# Altium PCB Sensor.PcbDoc
Units mil, origin at the board's own origin, x right, y up, seen from the top; angles counter-clockwise.
Board outline 3791.34 x 3901.57 mil, 2 copper layers (Top Layer, Bottom Layer); 36 components, 32 nets, 146 pads, 0 vias.
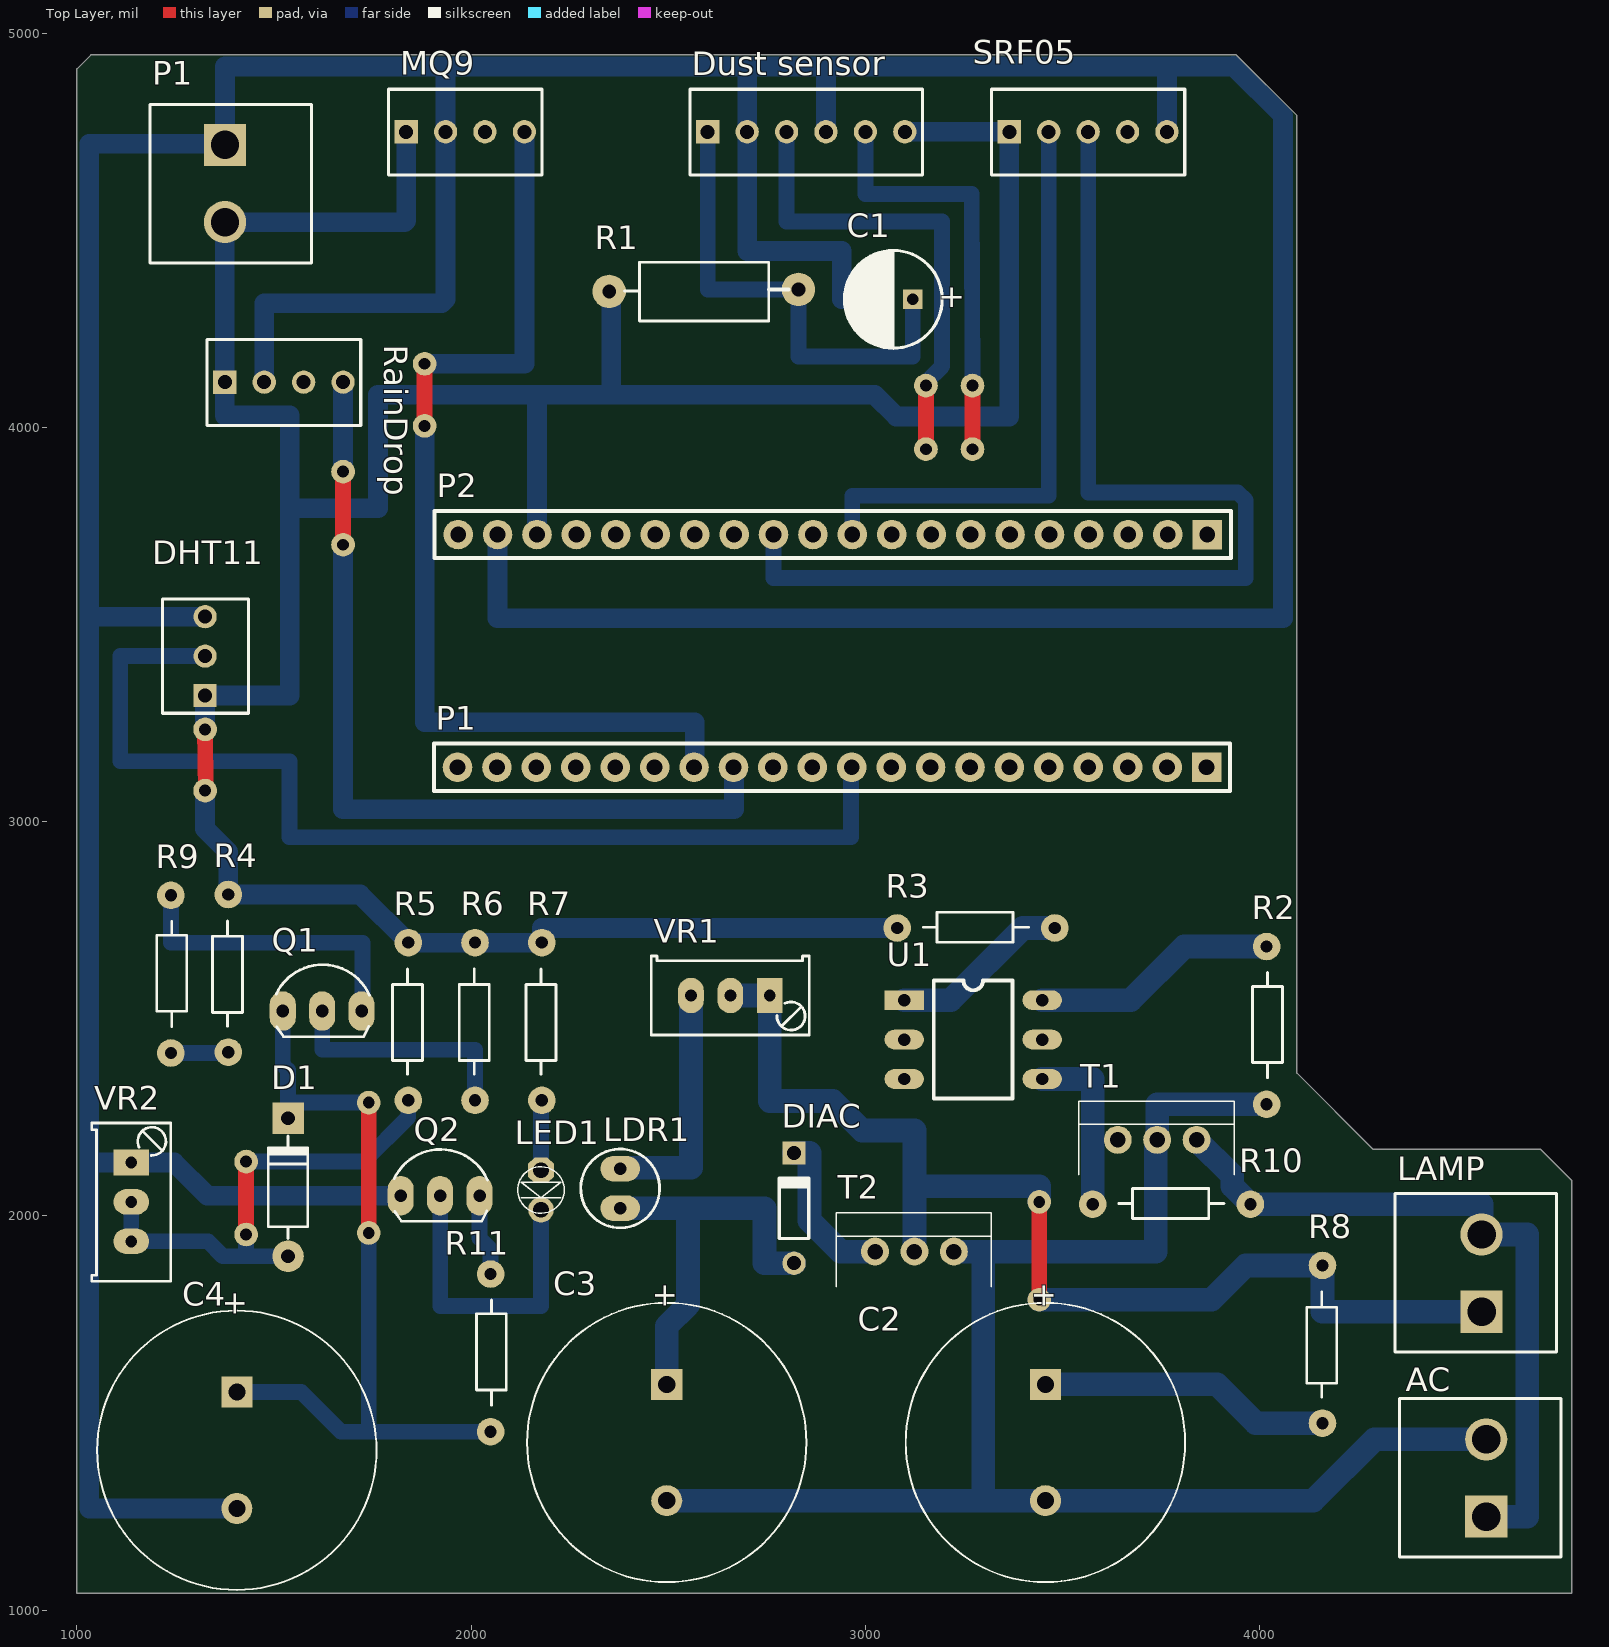
[diagram p0: Top Layer view]
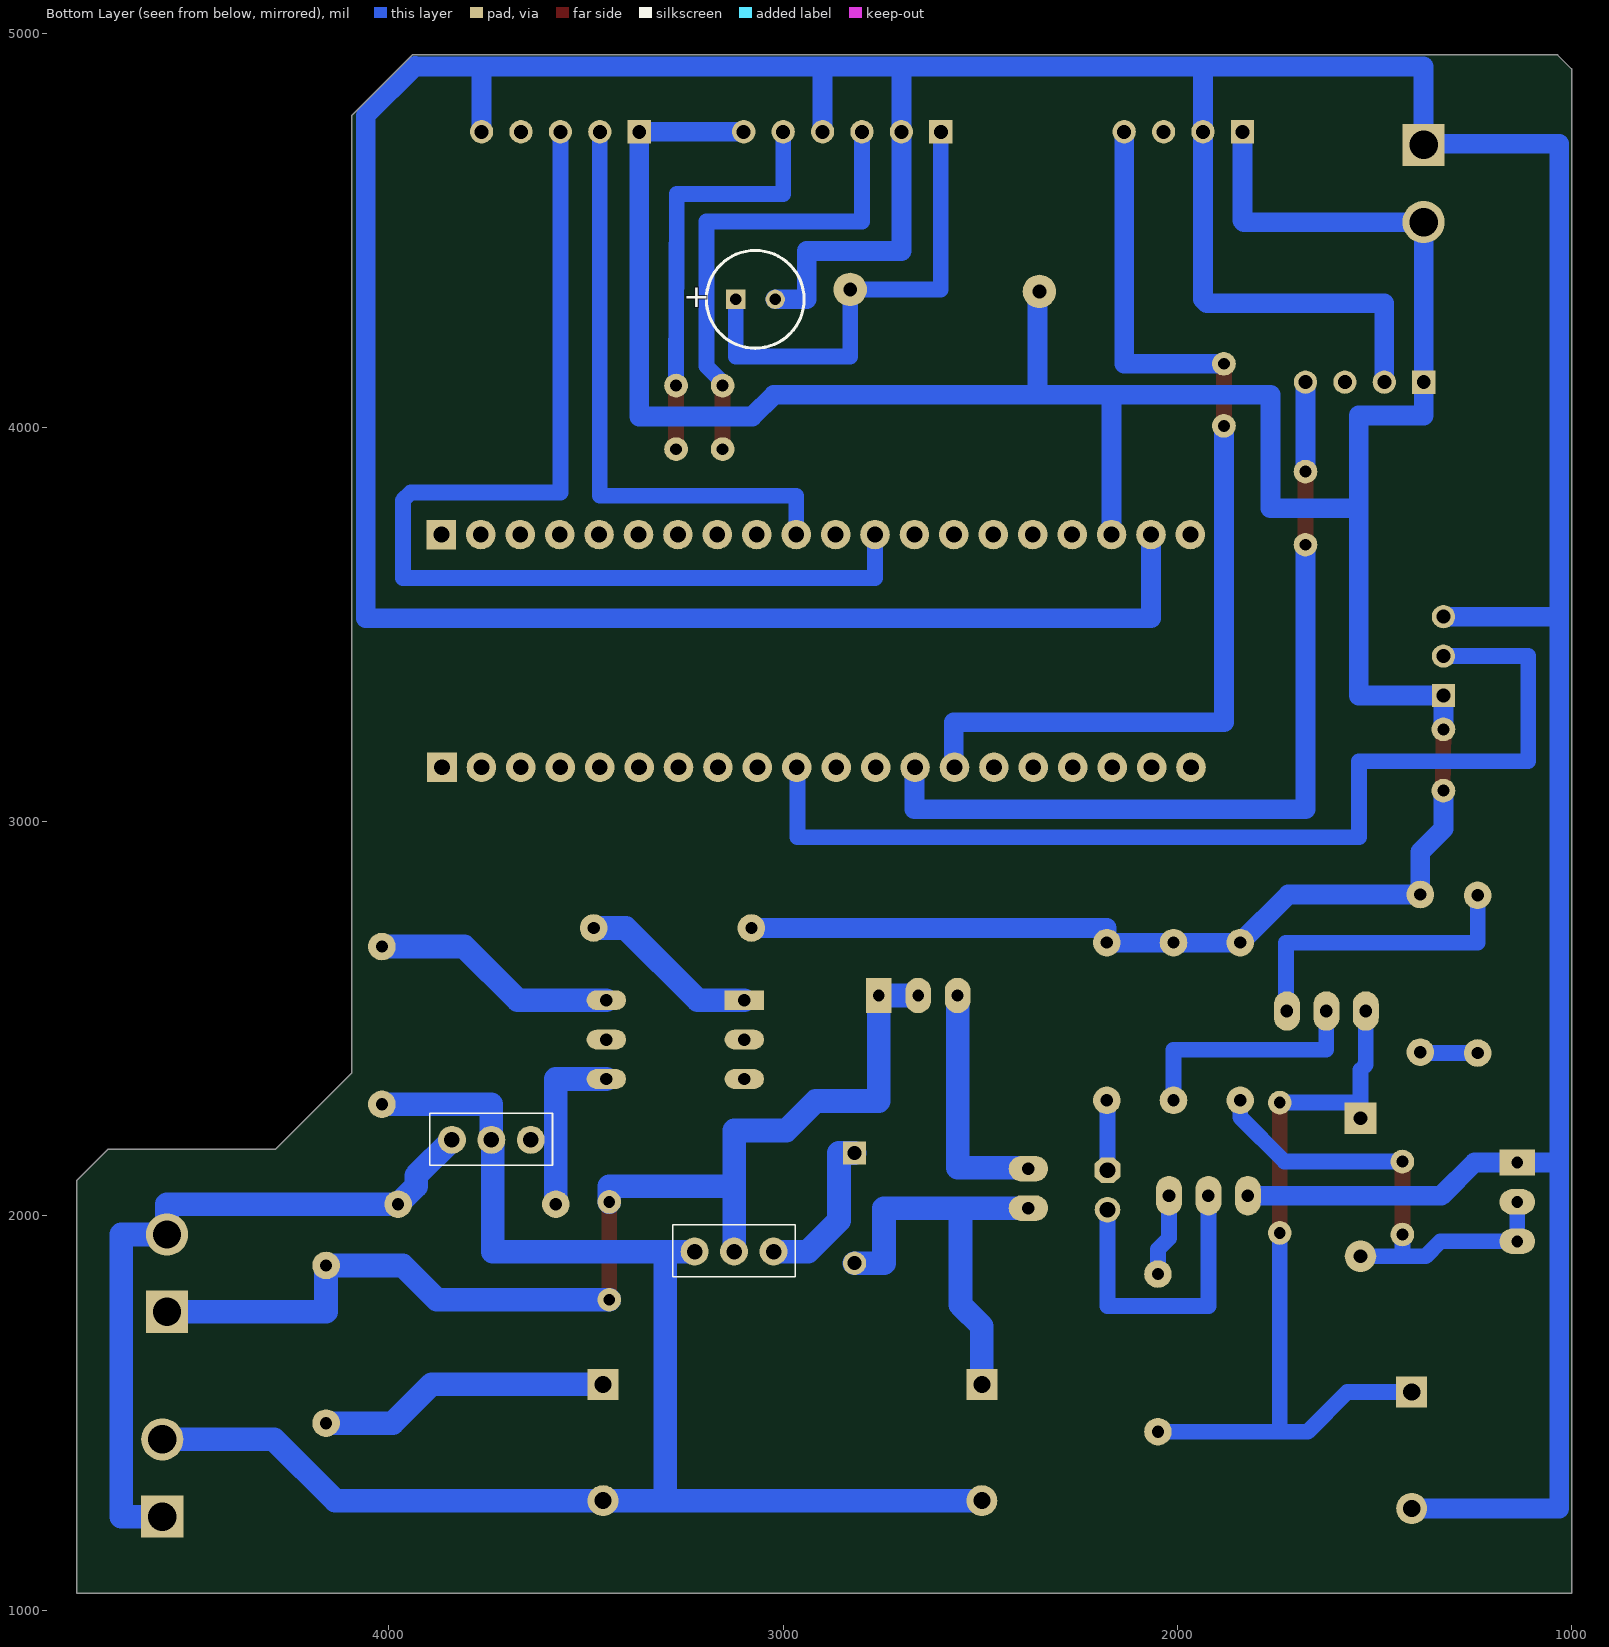
[diagram p1: Bottom Layer view, seen from below]
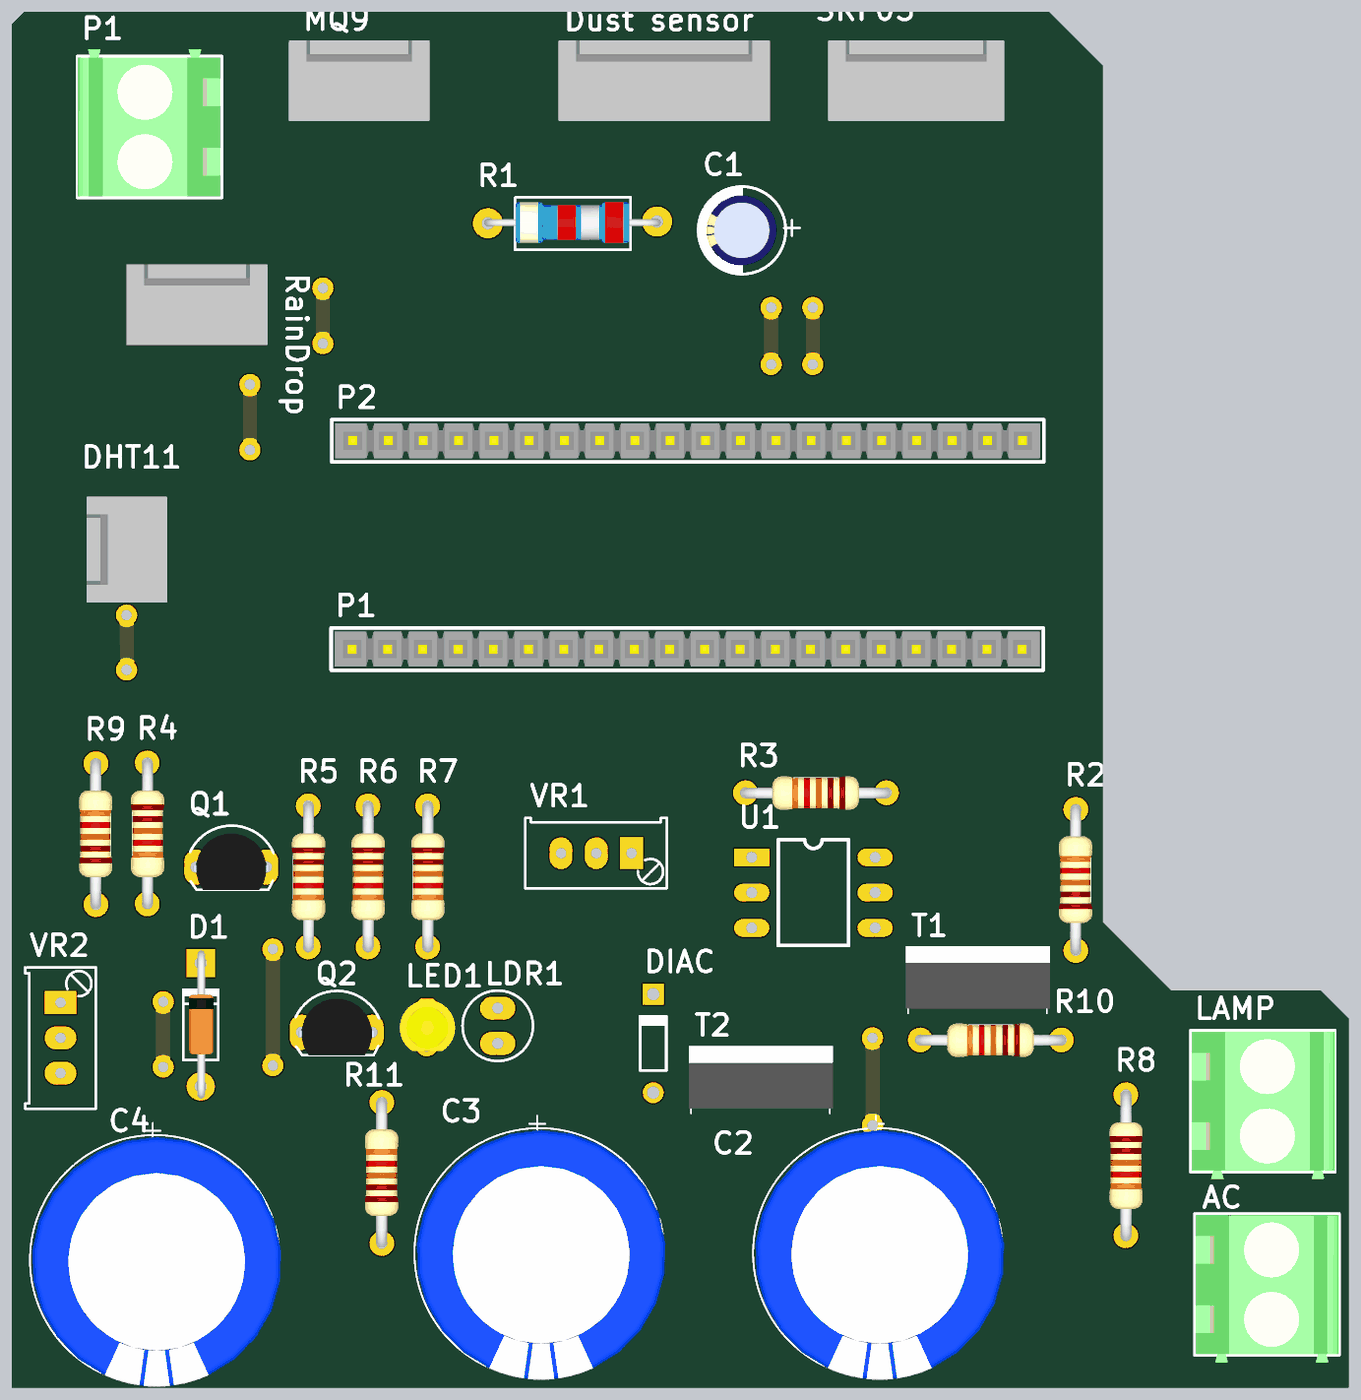
[diagram p2: 3D render of the assembled board from above, using the file's embedded part models]

## Layer stack, top to bottom
Top Solder: solder mask 0.4, Solder Resist, Dk 3.5
Top Layer: signal copper 1.4
Dielectric 1: dielectric 12.6, FR-4, Dk 4.8
Bottom Layer: signal copper 1.4
Bottom Solder: solder mask 0.4, Solder Resist, Dk 3.5

## Board outline
1000,1043.31 1000,4909.45 1035.43,4944.88 3940.94,4944.88 4094.49,4791.34 4094.49,2362.2 4287.4,2169.29 4712.6,2169.29 4791.34,2090.55 4791.34,1043.31

## Design rules (kind name [scope] priority, off if disabled: settings)
Clearance [All] p1: gap=20 ignorepadtopadclearanceinfootprint=FALSE
PolygonConnect [All] p1: connectstyle=Relief reliefconductorwidth=10 reliefentries=4 polygonreliefangle="90 Angle" airgapwidth=10
RoutingVias [All] p1: holewidth=30 width=60 viastyle="Through Hole" minholewidth=30 minwidth=60 maxholewidth=30 maxwidth=60
SolderMaskExpansion [All] p1: expansion=4
UnRoutedNet [All] p1: checkbadconnections=TRUE
Width [All] p1: maxlimit=60 minlimit=20 preferedwidth=60 toplayer_maxwidth=50 toplayer_prefwidth=40 minimp=50.000000 maximp=50.000000 favimp=50.000000
29 further rules are at their usual default settings.

## Components (designator, comment, footprint, x,y, rotation, side; value= is the part's Value field where it differs from the comment)
AC "Header 2" "TBlock 2" 4574.8,1237.07 r90 top
C1 "Cap Pol" "RADIAL C" 3120,4325 r180 top value=100uF
C2 "100uF" Cap-P-7.5/18BL 3456.69,1425.2 r270 top
C3 "100uF" Cap-P-7.5/18BL 2496.06,1425.2 r270 top
C4 "100uF" Cap-P-7.5/18BL 1405.51,1405.51 r270 top
D1 "1N4007" D1A 1535.43,1897.64 r270 top
DHT11 "Header3" HDR3 1325,3320 r90 top
DIAC "Diode" DO-35 2818.9,2019.68 r90 top value=FRxxx
"Dust sensor" "Header6" HDR6 2600,4750 r0 top
LAMP "Header 2" "TBlock 2" 4562.99,1756.76 r90 top
LDR1 "LDR" CDS 2377.95,2019.68 r90 top
LED1 "LED" LED-3MM-YELLOW 2177.17,2115.75 r270 top value="LED 3 ly Single Colour"
MQ9 "Header4" HDR4 1835,4750 r0 top
P1 "Header 20" "Header 20" 3865.35,3137.8 r180 top
P1 "Header 2" "TBlock 2" 1375.44,4716.84 r270 top
P2 "Header 20" "Header 20" 3866.93,3728.35 r180 top
Q1 "C1815" TO92-123 1622.05,2519.68 r0 top
Q2 "C1815" TO92-123 1921.26,2051.18 r0 top
R1 "Res" RES-1/2W 2610,4345 r180 top
R2 "1k" Res1/4W 4015.75,2488.19 r270 top value="R1/4W - 1K"
R3 "1k" Res1/4W 3275.59,2728.35 r0 top value="R1/4W - 1K"
R4 "1k" Res1/4W 1385.83,2610.24 r90 top value="R1/4W - 1K"
R5 "1k" Res1/4W 1842.49,2488.19 r90 top value="R1/4W - 1K"
R6 "1k" Res1/4W 2011.78,2488.19 r90 top value="R1/4W - 1K"
R7 "1k" Res1/4W 2181.08,2488.19 r90 top value="R1/4W - 1K"
R8 "1k" Res1/4W 4161.42,1669.29 r90 top value="R1/4W - 1K"
R9 "1k" Res1/4W 1236.22,2618.11 r270 top value="R1/4W - 1K"
R10 "1k" Res1/4W 3771.65,2027.56 r0 top value="R1/4W - 1K"
R11 "1k" Res1/4W 2047.24,1657.48 r270 top value="R1/4W - 1K"
RainDrop "Header4" HDR4 1375,4115 r0 top
SRF05 "Header5" HDR5 3365,4750 r0 top
T1 "BTA16" TO-220N 3640.16,2192.91 r270 top
T2 "BTA16" TO-220N 3024.41,1909.45 r270 top
U1 "MOC3021" DIP6 3098.43,2547.24 r0 top
VR1 "50K" VR-S3 2757.48,2559.06 r180 top value="Volume 50k"
VR2 "50K" VR-S3 1137.8,2135.43 r270 top value="Volume 50k"

## Footprints (in the part's own frame and the unit in brackets; to place one, negate y for a bottom-side part, rotate by r counter-clockwise, add the part's x,y. Pads: shape width x height; smd on the part's side, far side on the other; paste and mask are expansions set on the pad)
Cap-P-7.5/18BL [mm] "Polarized capacitors, Aluminum Electrolytic Capacitors, 2-Leads, Body 18x35.5x7.5x0.8"
  rect 2x2 hole 1.1: 1(-3.75,0)
  round 2 / inner rect 2x2 / far side round 2 hole 1.1: 2(3.75,0)
  silkscreen extent -9,-9 9,9, body extent -8.87,-8.87 9.13,9.13, height 16
CDS [mil] "QUANG TRO"
  oval 65x100 hole 32: 1(0,0) 2(100,0)
  silkscreen extent -50,-100 150,100
D1A [mil] "Diode 1A, W 100mil, L 350mil"
  round 80 hole 35: 1(0,0)
  rect 80x80 hole 35: 2(-350,0)
  silkscreen extent -305,-50 -45,50, body extent -386,-33 34,36, height 84
DIP6 [mm]
  rect 2.54x1.27 hole 0.8: 1(0,0)
  oval 2.54x1.27 hole 0.8: 2(0,-2.54) 3(0,-5.08) 4(8.89,-5.08) 5(8.89,-2.54) 6(8.89,0)
  silkscreen extent 1.91,-6.35 6.99,1.27, body extent 0.03,-6.35 8.86,1.29, height 5.4
DO-35 [mm] "Diode, Axial; Body 3.8 x 1.9 mm (LxDia. max), Lead Dia. 0.53 mm (max)"
  round 1.5 hole 0.9: 1(-3.55,0)
  rect 1.5x1.5 hole 0.9: 2(3.55,0)
  silkscreen extent -1.95,-0.95 2.05,0.95
HDR3 [mm] "Connector; Header; 3 Position"
  rect 1.5x1.5 hole 0.9: 1(0,0)
  round 1.5 hole 0.9: 2(2.54,0) 3(5.08,0)
  silkscreen extent -1.14,-2.79 6.22,2.74, body extent -1.27,-2.92 6.35,2.88, height 11.72
HDR4 [mm] "Connector; Header; 4 Position"
  rect 1.5x1.5 hole 0.9: 1(0,0)
  round 1.5 hole 0.9: 2(2.54,0) 3(5.08,0) 4(7.62,0)
  silkscreen extent -1.14,-2.79 8.76,2.74, body extent -1.27,-2.92 8.89,2.88, height 11.72
HDR5 [mm] "Connector; Header; 5 Position"
  rect 1.5x1.5 hole 0.9: 1(0,0)
  round 1.5 hole 0.9: 2(2.54,0) 3(5.08,0) 4(7.62,0) 5(10.16,0)
  silkscreen extent -1.14,-2.79 11.3,2.74, body extent -1.27,-2.92 11.43,2.88, height 11.72
HDR6 [mm] "Connector; Header; 6 Position"
  rect 1.5x1.5 hole 0.9: 1(0,0)
  round 1.5 hole 0.9: 2(2.54,0) 3(5.08,0) 4(7.62,0) 5(10.16,0) 6(12.7,0)
  silkscreen extent -1.14,-2.79 13.84,2.74, body extent -1.27,-2.92 13.97,2.88, height 11.72
"Header 20" [mil] "Connector; Header; 20 Position; Solder Pad 35mil"
  rect 75x75 hole 40: 1(0,0)
  round 75 hole 40: 2(100,0) 3(200,0) 4(300,0) 5(400,0) 6(500,0) 7(600,0) 8(700,0) 9(800,0) 10(900,0) 11(1000,0) 12(1100,0) 13(1200,0) 14(1300,0) 15(1400,0) 16(1500,0) 17(1600,0) 18(1700,0) 19(1800,0) 20(1900,0)
  silkscreen extent -60,-60 1960,60, body extent -50,-50 1950,50, height 330
LED-3MM-YELLOW [mil]
  oct 65x65 hole 40: 1(0,0)
  round 65 hole 40: 2(100,0)
  silkscreen extent -9,-59 109,59, body extent -27,-77 117,80, height 181
"RADIAL C" [mm] "Capacitor, Electrolytic, Radial; Body 6.3 x 6.8 mm (Dia.xH typ); Pin Spacing 2.5 mm (typ)"
  rect 1.25x1.25 hole 0.75: 1(0,0)
  round 1.25 hole 0.75: 2(2.54,0)
  silkscreen extent -1.9,-3.15 4.4,3.15, body extent -1.27,-2.54 3.81,2.54, height 13.7
Res1/4W [mil] "R 1/4W, 2 Pin, 350mil"
  round 70 hole 31: 1(-195,2) 2(205,2)
  silkscreen extent -129,-34 138,42, body extent -209,-46 217,48, height 111
RES-1/2W [mil]
  round 85 hole 35: 1(-220,-5) 2(260,0)
  silkscreen extent -195,-74 221,75, body extent -230,-60 270,56, height 121
"TBlock 2" [mil] "Connector; Terminal; 2 Positions; Solder Pad 35mil"
  rect 107x107 hole 72: 1(0,0)
  round 107 hole 72: 2(196,0)
  silkscreen extent -102,-190 300,220, body extent -122,-189 296,217, height 560
TO92-123 [mil] "TO-92"
  oval 66x100 hole 32: 1(-100,0) 2(0,0) 3(100,0)
  silkscreen extent -117,-65 120,118, body extent -109,-66 109,95, height 245
TO-220N [mm]
  round 1.8 hole 1: 1(0,0) 2(0,2.54) 3(0,5.08)
  silkscreen extent -2.5,-2.5 2.25,7.5, body extent -2.62,-2.67 1.88,7.73, height 18
VR-S3 [mil] "Variable Resistor"
  rect 65x90 hole 30: 1(0,0)
  oval 65x90 hole 30: 2(100,0) 3(200,0)
  silkscreen extent -100,-100 301,100, body extent -91,-98 291,90, height 430

## Part data
AC LAMP P1: "Header, 2-Pin", LatestRevisionDate=17-Jul-2002, LatestRevisionNote="Re-released for DXP Platform.", Publisher="Altium Limited"
C1: "Polarized Capacitor", LatestRevisionDate=17-Jul-2002, LatestRevisionNote="Re-released for DXP Platform.", PackageReference=POLAR0.8, Published=8-Jun-2000, Publisher="Altium Limited"
C2 C3 C4: library part "Cap Pol", "Cap Pol"
D1: library part "Diode 1A", "Diode 1A"
DHT11: "Header IDC, 3 x 1 Pin Vertical 2.54mm Pitch (Non-Boxed, Male)", Manufacturer="Würth Elektronik eiSos GmbH", partNo=613002143121, ComponentLink1 Description=Manufacturer, ComponentLink1URL=http://www.we-online.com, ComponentLink2 Description=Datasheet, ComponentLink2URL=http://katalog.we-online.de/em/datasheet/6130xx143121.pdf, Created by="Karrer Zheng", Created Date="29 March 2013", NoPins=02
"Dust sensor": "Header IDC, 6 x 1 Pin Vertical 2.54mm Pitch (Non-Boxed, Male)", Manufacturer="Würth Elektronik eiSos GmbH", partNo=613002143121, ComponentLink1 Description=Manufacturer, ComponentLink1URL=http://www.we-online.com, ComponentLink2 Description=Datasheet, ComponentLink2URL=http://katalog.we-online.de/em/datasheet/6130xx143121.pdf, Created by="Karrer Zheng", Created Date="29 March 2013", NoPins=02
LDR1: "Quang Tro"
LED1: "LED Single colour Green and Red"
MQ9 RainDrop: "Header IDC, 4 x 1 Pin Vertical 2.54mm Pitch (Non-Boxed, Male)", Manufacturer="Würth Elektronik eiSos GmbH", partNo=613002143121, ComponentLink1 Description=Manufacturer, ComponentLink1URL=http://www.we-online.com, ComponentLink2 Description=Datasheet, ComponentLink2URL=http://katalog.we-online.de/em/datasheet/6130xx143121.pdf, Created by="Karrer Zheng", Created Date="29 March 2013", NoPins=02
P1 P2: "Header, 20-Pin", LatestRevisionDate=17-Jul-2002, LatestRevisionNote="Re-released for DXP Platform.", Publisher="Altium Limited"
Q1 Q2: "NPN 600mW, ECB", =C2383
R1: Manufacturer="Generic Components", Class=Passive, Published=08/06/2000, Publisher="Altium Hobart Technology Centre", SubClass=R
R2 R3 R4 R5 R6 R7 R8 R9 R10 R11: library part Res1/4W, "Resistor"
SRF05: "Header IDC, 5 x 1 Pin Vertical 2.54mm Pitch (Non-Boxed, Male)", Manufacturer="Würth Elektronik eiSos GmbH", partNo=613002143121, ComponentLink1 Description=Manufacturer, ComponentLink1URL=http://www.we-online.com, ComponentLink2 Description=Datasheet, ComponentLink2URL=http://katalog.we-online.de/em/datasheet/6130xx143121.pdf, Created by="Karrer Zheng", Created Date="29 March 2013", NoPins=02
T1 T2: "Triac", ComponentLink2Description="Open Datasheet", ComponentLink2URL=H:\LIBRARY\LIBRARY.Datasheet\
U1: "Single Opto"
VR1 VR2: library part VR-S, "Var Resistor"
DIAC: Code_JEDEC=DO-204-AH, ComponentLink1Description="Digikey Part Link", ComponentLink1URL=http://www.fairchildsemi.com/, ComponentLink2Description="Open Datasheet", ComponentLink2URL=H:\LIBRARY\LIBRARY.Datasheet\ds26003.pdf, DatasheetDocument=1997, LatestRevisionDate=17-Jul-2002, LatestRevisionNote="Re-released for DXP Platform.", PackageReference=DO-35, Published=8-Jun-2000, Publisher="Altium Limited", Vendor=Digikey

## Free pads (board coordinates)
  round 60 hole 30: 6(3153.54,4106.3) 8(3271.65,4106.3) 9(3153.54,3944.88) 10(3271.65,3944.88) 16(1675,3887.99) 17(1675,3702.56) 18(1881.89,4161.42) 19(1881.89,4003.94) 20(1325,3234.06) 21(1325,3078.74) 23(1740.16,1956.69) 25(1740.16,2287.4) 26(1429.13,1952.76) 27(1429.13,2137.8) 28(3440.94,2035.43) 29(3440.94,1787.4)

## Nets (pads, with @x,y where several pads share a name; then routed paths per layer and width w, separated by ;. In a path a pad name is that pad's centre, name@x,y a point inside that pad or via, vN(x,y) a via of type N, cw(c..) or ccw(c..) an arc to the next point about the centre after c; other vN are vias at no path point)
Aout_MQ9: MQ9.4 P1.14 pad.18 pad.19 | length 2551.9
  Top Layer w40: pad.19 pad.18
  Bottom Layer w50: pad.19 1881.89,3251.97 2566.93,3251.97 2566.93,3137.8 P1.14 ; pad.18 2135,4161.42 MQ9.4
Aout_RainDrop: P1.13 pad.16 pad.17 RainDrop.4 | length 2183.3
  Top Layer w40: pad.17 pad.16
  Bottom Layer w50: pad.17 1675,3031.5 2666.93,3031.5 2666.93,3137.8 P1.13 ; pad.16 RainDrop.4
Data: DHT11.2 P1.10 | length 2706.9
  Bottom Layer w40: DHT11.2 1110,3420 1110,3153.54 1539.37,3153.54 1539.37,2960.63 2963.39,2960.63 2963.39,3137.8 P1.10
"DIM control": R4.1 R9.2 | length 146.5
  Bottom Layer w40: R9.2 1381.7,2413.11 R4.1
Dou_MQ9: MQ9.3
Dout_RainDrop: RainDrop.3
Echo: P2.12 SRF05.3 | length 2827.6
  Bottom Layer w40: P2.12 2766.93,3618.11 3964.57,3618.11 3964.57,3814.96 3944.53,3835 3565,3835 SRF05.3
GND: "Dust sensor.2" "Dust sensor.4" C1.2 C4.2 DHT11.3 MQ9.2 P1.1@1375.44,4716.84 P2.19 Q2.1 RainDrop.2 SRF05.5 VR2.1 | length 14203.6
  Bottom Layer w50: 1047.24,3520 DHT11.3 ; C4.2 1031.5,1257.87 1031.5,2135.43 ; RainDrop.2 1475,4315 1925,4315 1935,4325 MQ9.2 1935,4915.44 ; Q2.1 1330.71,2051.18 1246.46,2135.43 VR2.1 1031.5,2135.43 ; P2.19 2066.93,3515.75 4059.06,3515.75 4059.06,4791.17 3932.91,4917.32 3931.02,4915.44 3754.56,4915.44 ; 2900,4750 2900,4915.44 ; C1.2 2940,4325 2940,4447.5 2700,4447.5 2700,4750 2700,4905.44 2710,4915.44 ; SRF05.5 3765,4905 3754.56,4915.44 ; 1031.5,2135.43 1031.5,4720 1372.28,4720 1375.44,4716.84 1375.44,4915.44 1935,4915.44 ; 1935,4915.44 2710,4915.44 ; 2710,4915.44 2900,4915.44 ; 2900,4915.44 3754.56,4915.44
LED: "Dust sensor.3" pad.6 pad.9 | length 1216.2
  Top Layer w40: pad.9 pad.6
  Bottom Layer w40: 2800,4750 2800,4522.5 3194.61,4522.5 3194.61,4155.61 3155,4116.01 pad.6
NetAC_1: AC.1 LAMP.2 R10.2 T1.3 | length 1818.9
  Bottom Layer w60: T1.3 3931,2102.07 3931,2075.21 R10.2 4562.99,2029.56 LAMP.2 4679,1952.76 4679,1237.07 AC.1
NetAC_2: AC.2 C2.2 C3.2 R2.2 T1.2 T2.3 | length 3974.4
  Bottom Layer w60: C3.2 3338,1277.56 ; T2.3 3299.21,1909.45 ; 3740.16,2279 T1.2 3736.22,2188.98 3736.22,1909.45 3299.21,1909.45 ; 3740.16,2283.19 R2.2 ; AC.2 4291.34,1433.07 4135.83,1277.56 C2.2 3338,1277.56 ; 3299.21,1909.45 3299.21,1277.56 3338,1277.56
NetC1_1: "Dust sensor.1" C1.1 R1.1 | length 1235
  Bottom Layer w40: 2600,4750 2600,4350 R1.1 2830,4180 3120,4180 C1.1
NetC2_1: C2.1 R8.1 | length 743.5
  Bottom Layer w60: C2.1 3891.73,1572.83 3990.28,1474.29 R8.1
NetC3_1: C3.1 DIAC.1 LDR1.1 | length 1049.2
  Bottom Layer w60: LDR1.1 2542.13,2019.69 2550,2011.81 2550,1774.41 2496.06,1720.47 C3.1 C3.1@2496.06,1568.9 ; 2550,2019.69 2744.09,2019.69 2744.09,1879.92 DIAC.1
NetC4_1: C4.1 D1.2 pad.23 pad.25 Q1.1 R11.2 | length 1960.6
  Top Layer w40: pad.23 pad.25
  Bottom Layer w40: C4.1 1568.9,1553.15 1669.57,1452.48 1740.16,1452.48 ; Q1.1 1522.05,2383.46 1535.43,2370.08 1535.43,2291.34 1539.37,2287.4 pad.25 ; pad.23 1740.16,1452.48 ; R11.2 1740.16,1452.48
NetD1_1: D1.1 pad.26 pad.27 R5.1 VR2.2 VR2.3 | length 1254.5
  Top Layer w40: pad.26 pad.27
  Bottom Layer w40: VR2.2 VR2.3 1332.28,1935.43 1370.08,1897.64 1429.13,1897.64 ; pad.26 1429.13,1897.64 ; pad.27 1728.35,2137.8 1840.49,2249.94 R5.1 ; D1.1 1429.13,1897.64
NetDIAC_2: DIAC.2 T2.1 | length 409.4
  Bottom Layer w60: DIAC.2 2858.27,2159.45 2858.27,1988.19 2937.01,1909.45 T2.1
NetLAMP_1: LAMP.1 pad.28 pad.29 R8.2 T2.2 VR1.1 VR1.2 | length 2952.3
  Top Layer w40: pad.29 pad.28
  Bottom Layer w60: VR1.2 2657.48,2559 VR1.1@2757.48,2559 ; VR1.1 VR1.1@2757.48,2559 ; T2.2 3124.41,2074.8 ; pad.29 3877.95,1787.4 3964.84,1874.29 R8.2 4159.42,1756.76 LAMP.1 ; pad.28 3440.94,2074.8 3124.41,2074.8 ; VR1.1@2757.48,2559 2757.48,2291.34 2917.32,2291.34 2992.13,2216.54 3124.41,2216.54 3124.41,2074.8
NetLDR1_2: LDR1.2 VR1.3 | length 616.5
  Bottom Layer w60: LDR1.2@2377.95,2122.05 2557.48,2122.05 VR1.3
NetLED1_1: LED1.1 R7.1 | length 178.2
  Bottom Layer w40: LED1.1 2177.17,2291.28 R7.1
NetLED1_2: LED1.2 Q2.2 | length 779.5
  Bottom Layer w40: Q2.2 1921.26,1771.65 2177.17,1771.65 LED1.2
NetQ1_2: Q1.2 R6.1 | length 614.2
  Bottom Layer w40: Q1.2 1622.05,2421.26 2009.78,2421.26 R6.1
NetQ1_3: Q1.3 R9.1 | length 759.9
  Bottom Layer w40: R9.1 1238.22,2692.91 1724.41,2692.91 Q1.3@1724.41,2539.37
NetQ2_3: Q2.3 R11.1 | length 210.3
  Bottom Layer w40: Q2.3 2021.26,1943.31 2049.24,1915.32 R11.1
NetR2_1: R2.1 U1.6 | length 625.6
  Bottom Layer w60: U1.6 3673.23,2547.24 3809.17,2683.19 R2.1
NetR3_2: R3.2 U1.1 | length 458
  Bottom Layer w60: U1.1 3216.54,2547.24 3399.64,2730.35 R3.2
NetR10_1: R10.1 T1.1 U1.4 | length 445.9
  Bottom Layer w60: U1.4 3576.65,2347.24 R10.1
"ON/OFF LAMP": U1.2
Out: SRF05.4
Trigger: P2.10 SRF05.2 | length 1519.7
  Bottom Layer w40: P2.10 2966.93,3826.77 3465,3826.77 SRF05.2
VCC: "Dust sensor.6" DHT11.1 MQ9.1 P1.2@1375.44,4520.84 P2.18 pad.20 pad.21 R1.2 R3.1 R4.2 R5.2 R6.2 R7.2 RainDrop.1 SRF05.1 | length 8305.1
  Top Layer w40: pad.21 1326.77,3078.74 pad.20
  Bottom Layer w50: pad.21 1325,2982.09 1383.83,2923.26 R4.2 1718.44,2815.24 R5.2 R6.2 R7.2 2179.08,2730.35 R3.1 ; pad.20 DHT11.1 1540,3320 1540,3795.28 ; MQ9.1 1835,4525 1830.84,4520.84 1375.44,4520.84 1375,4520.4 RainDrop.1 1375,4030.47 1539.99,4030.47 1540,3795.28 ; P2.18 2166.93,4080.32 2169.29,4082.68 ; R1.2 2355,4340 2355,4102.36 ; 3100,4750 SRF05.1 3365,4027.77 3078.53,4027.77 3023.62,4082.68 2169.29,4082.68 ; 1540,3795.28 1763.78,3795.28 1763.78,4082.68 2169.29,4082.68
Vo: "Dust sensor.5" pad.8 pad.10 | length 1075
  Top Layer w40: pad.10 pad.8
  Bottom Layer w40: 3000,4750 3000,4592.5 3269.83,4592.5 pad.8
pads on no net: P1.1@3865.35,3137.8 P1.2@3765.35,3137.8 P1.3 P1.4 P1.5 P1.6 P1.7 P1.8 P1.9 P1.11 P1.12 P1.15 P1.16 P1.17 P1.18 P1.19 P1.20 P2.1 P2.2 P2.3 P2.4 P2.5 P2.6 P2.7 P2.8 P2.9 P2.11 P2.13 P2.14 P2.15 P2.16 P2.17 P2.20 U1.3 U1.5

## Text inside footprints (layer, text, board x,y; h text height)
C1: Top Overlay "+" at 3252.87,4354.53 h59.06 r180; Bottom Overlay "+" at 3252.87,4354.53 h59.06 r180
C2: Top Overlay "+" at 3427.68,1831.69 h59.06 r270
C3: Top Overlay "+" at 2467.05,1831.69 h59.06 r270
C4: Top Overlay "+" at 1376.5,1812.01 h59.06 r270